# Altium PCB PCB_MEZ.PcbDoc
Units mm, origin at the board's own origin, x right, y up, seen from the top; angles counter-clockwise.
Board outline 65 x 67 mm, 2 copper layers (Top Layer, Bottom Layer); 7 components, 43 nets, 157 pads, 0 vias.
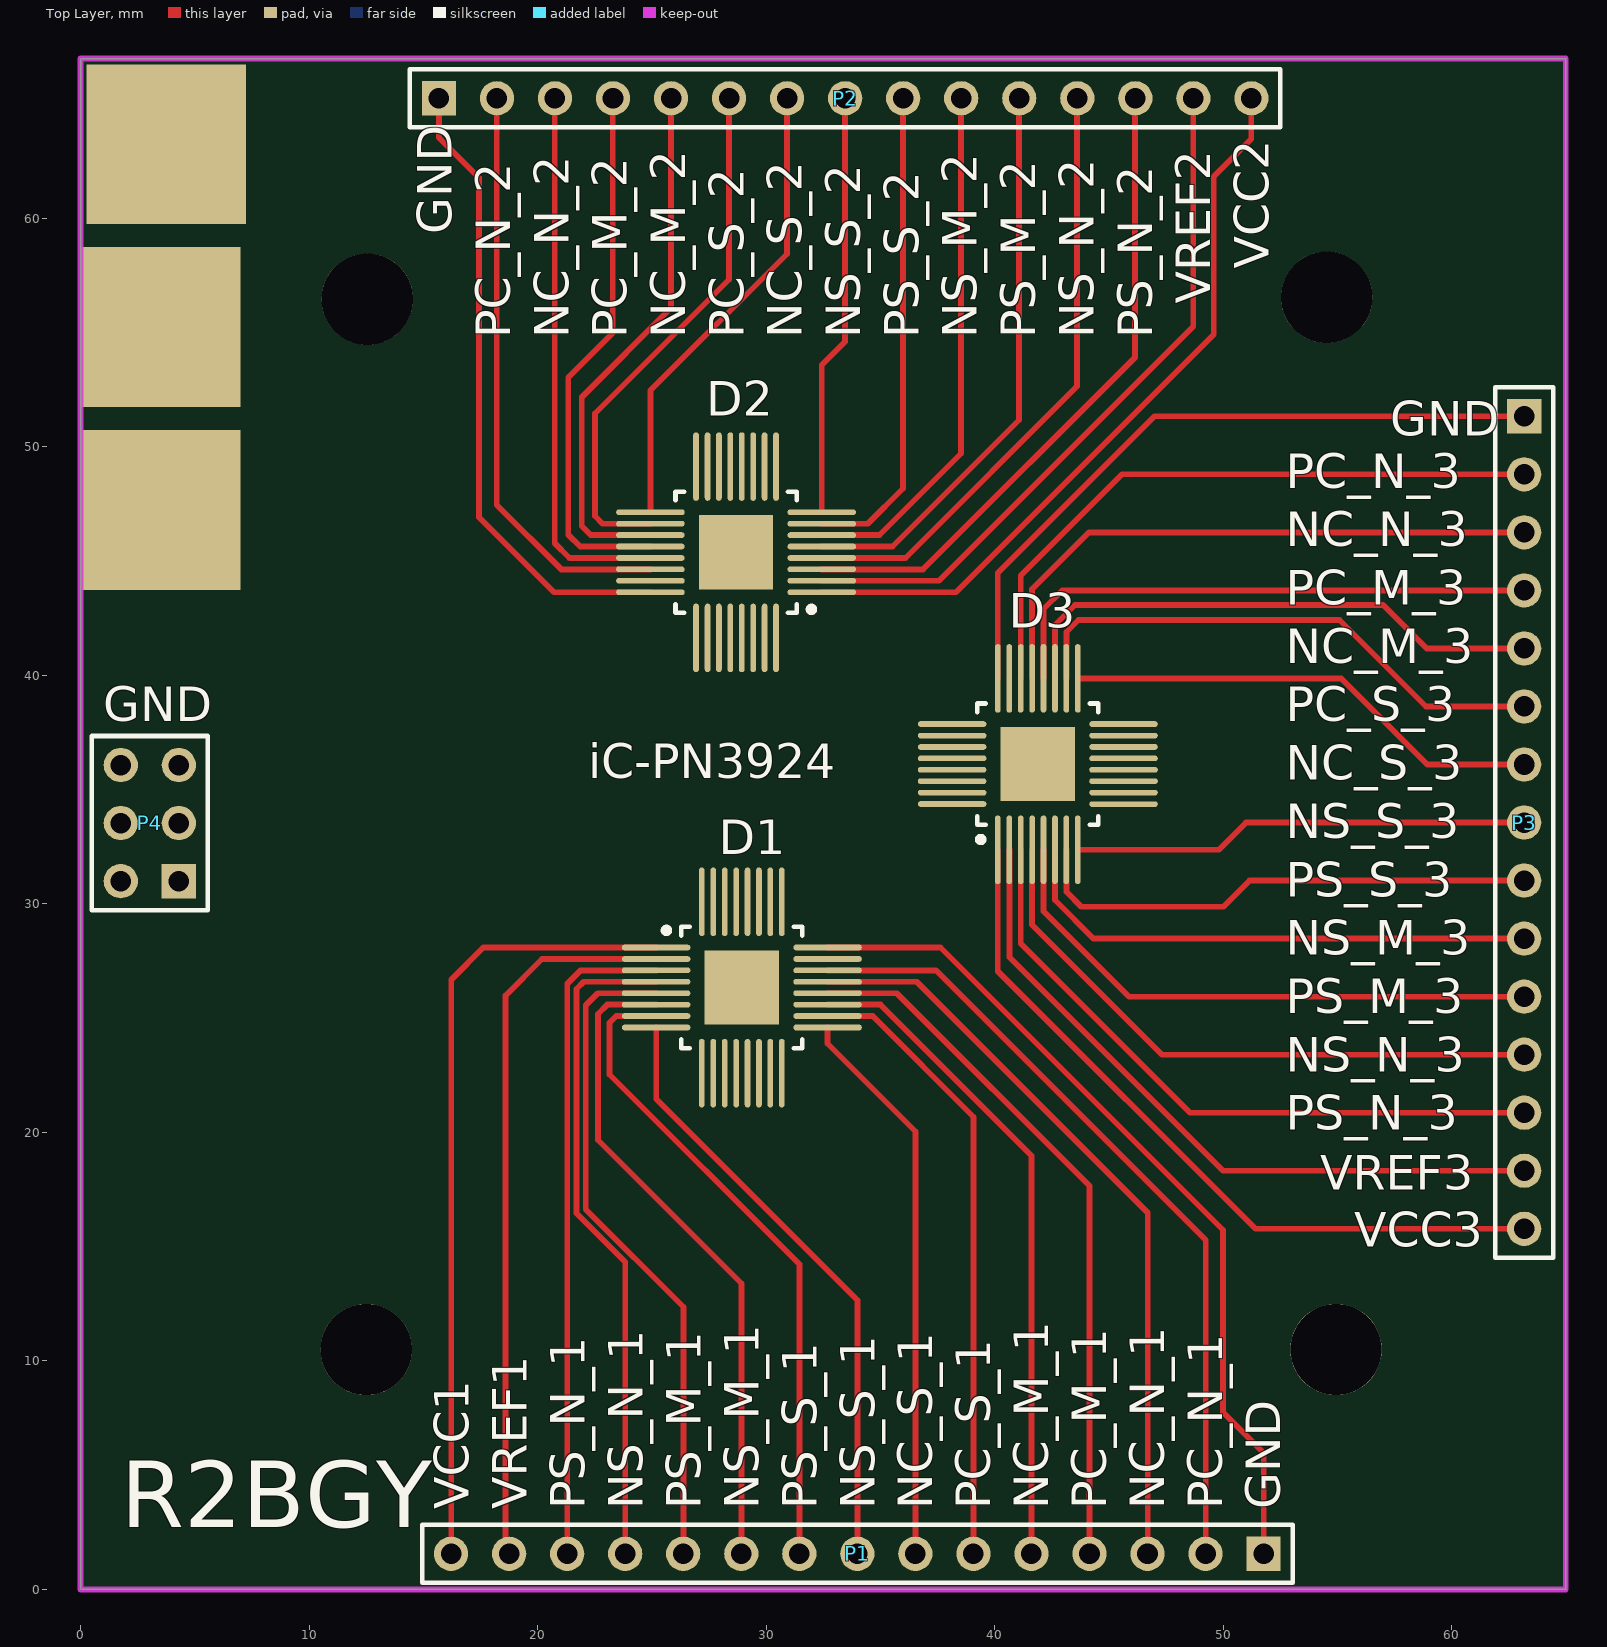
[diagram p0: Top Layer view]
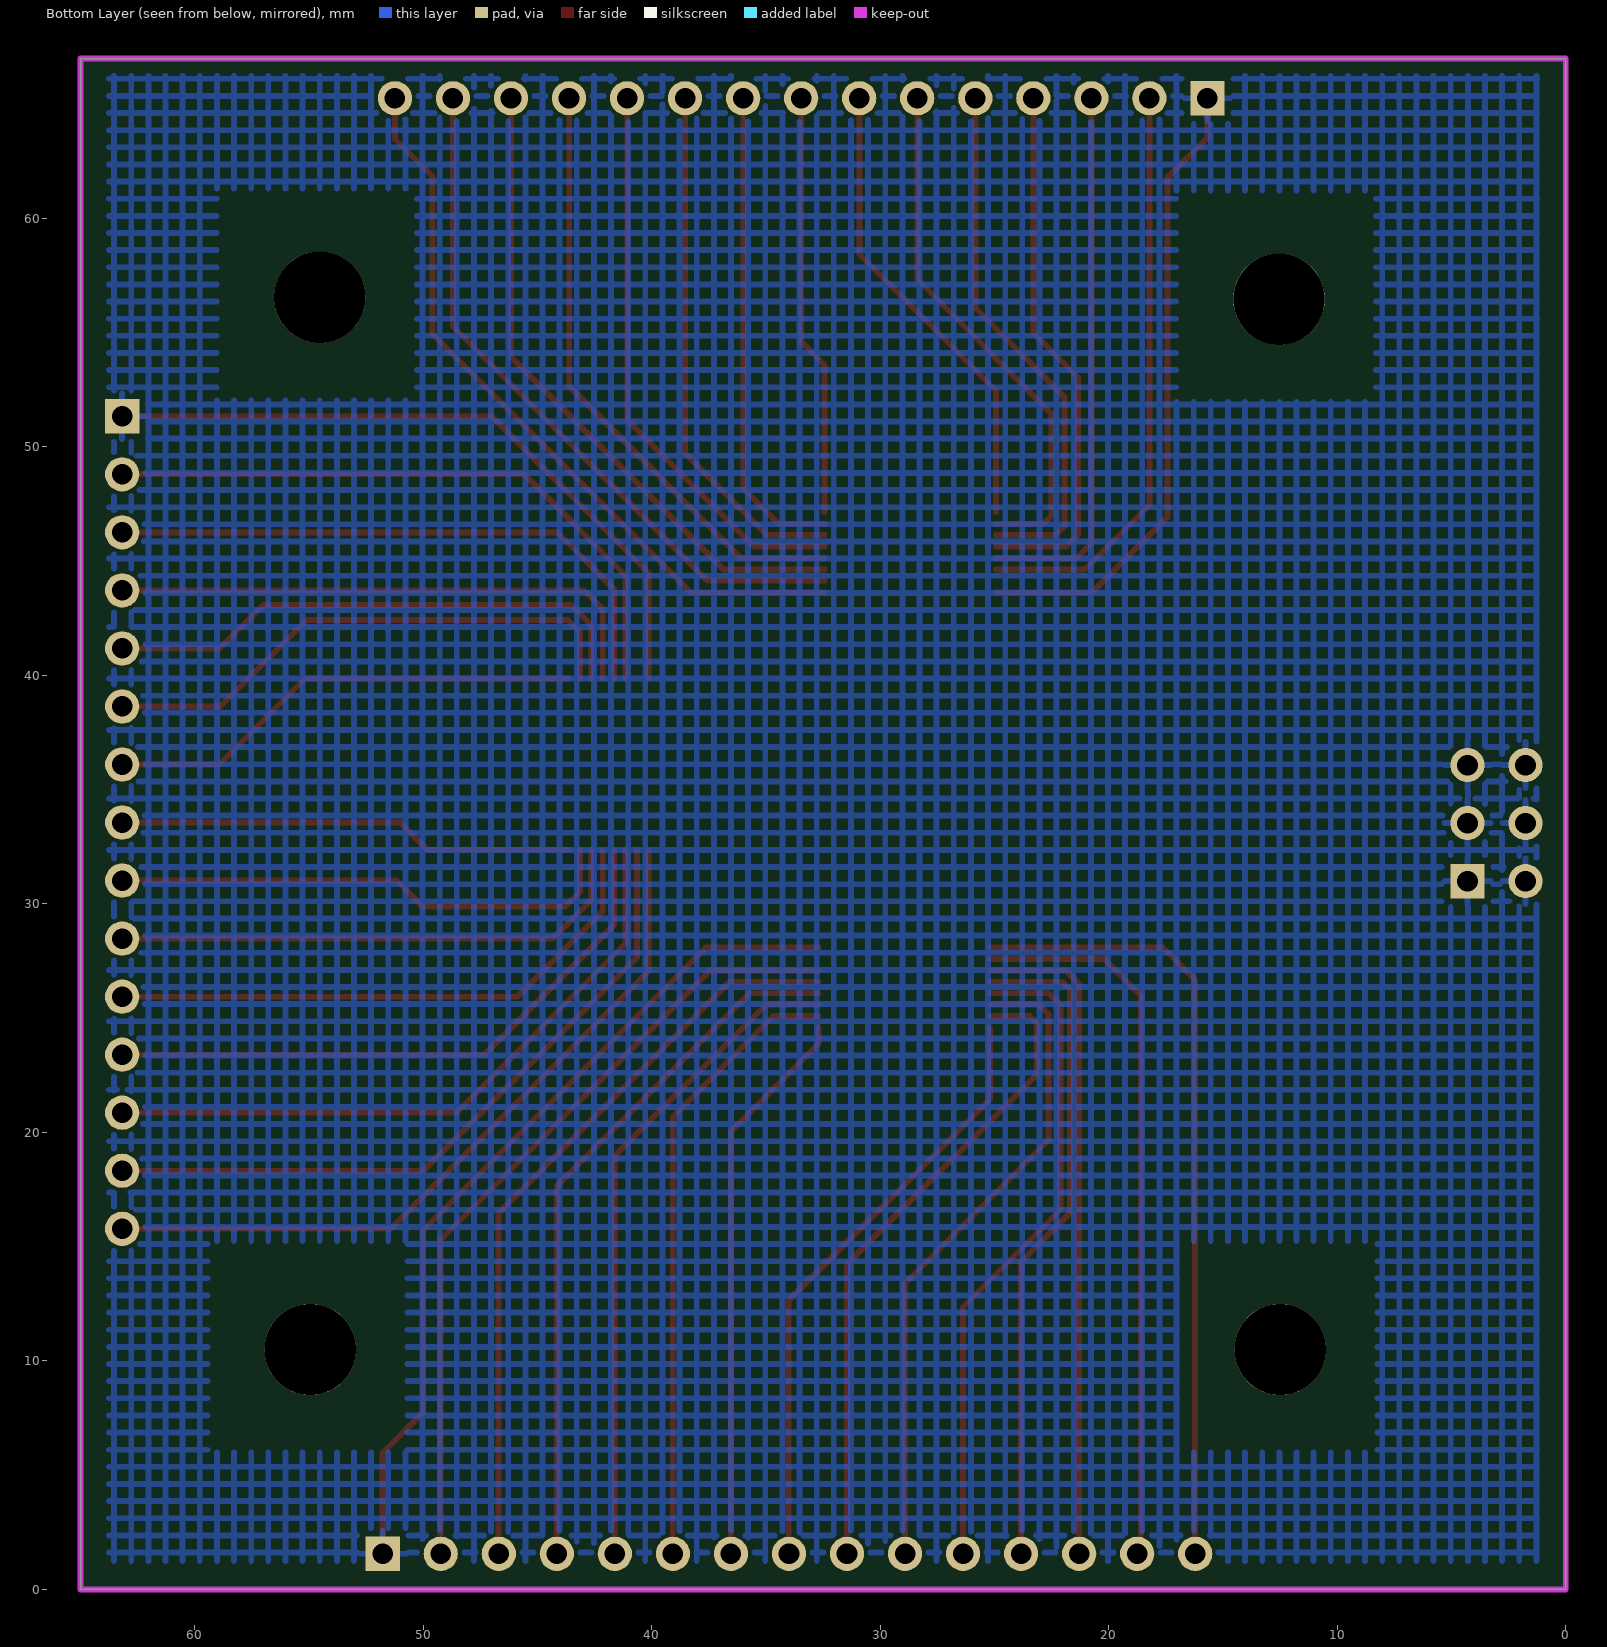
[diagram p1: Bottom Layer view, seen from below]

## Layer stack, top to bottom
Top Solder: solder mask 0.0102, Solder Resist, Dk 3.5
Top Layer: signal copper 0.0356
Dielectric 1: dielectric 0.32, FR-4, Dk 4.8
Bottom Layer: signal copper 0.0356
Bottom Solder: solder mask 0.0102, Solder Resist, Dk 3.5

## Board outline
0,0 65,0 65,67 0,67

## Design rules (kind name [scope] priority, off if disabled: settings)
Clearance [All] p1: gap=0.15
PolygonConnect [All] p1: connectstyle=Relief reliefconductorwidth=0.254 reliefentries=4 polygonreliefangle="90 Angle" airgapwidth=0.254
RoutingVias [All] p1: holewidth=0.711 width=1.27 viastyle="Through Hole" minholewidth=0.711 minwidth=1.27 maxholewidth=0.711 maxwidth=1.27
SolderMaskExpansion [All] p1: expansion=0.102
Width [All] p1: maxlimit=0.254 minlimit=0.254 preferedwidth=0.254
29 further rules are at their usual default settings.

## Components (designator, comment, footprint, x,y, rotation, side; value= is the part's Value field where it differs from the comment)
D1 "iC-PN3924" iC-PN3924 28.941,26.344 r0 top
D2 "iC-PN3924" iC-PN3924 28.687,45.394 r180 top
D3 "iC-PN3924" iC-PN3924 41.895,36.123 r90 top
P1 "Header 15" HDR1X15 51.776,1.56 r180 top
P2 "Header 15" HDR1X15 15.683,65.263 r0 top
P3 "Header 15" HDR1X15 63.181,51.344 r270 top
P4 "GND" HDR2X3 4.3,31 r90 top

## Footprints (in the part's own frame and the unit in brackets; to place one, negate y for a bottom-side part, rotate by r counter-clockwise, add the part's x,y. Pads: shape width x height; smd on the part's side, far side on the other; paste and mask are expansions set on the pad)
HDR1X15 [mm] "Connector; Header; 15 Position"
  rect 1.5x1.5 hole 0.9: 1(0,0)
  round 1.5 hole 0.9: 2(2.54,0) 3(5.08,0) 4(7.62,0) 5(10.16,0) 6(12.7,0) 7(15.24,0) 8(17.78,0) 9(20.32,0) 10(22.86,0) 11(25.4,0) 12(27.94,0) 13(30.48,0) 14(33.02,0) 15(35.56,0)
  silkscreen extent -1.27,-1.27 36.83,1.27
HDR2X3 [mm] "Connector; Header; 3x2 Position"
  rect 1.5x1.5 hole 0.9: 1(0,0)
  round 1.5 hole 0.9: 2(0,2.54) 3(2.54,0) 4(2.54,2.54) 5(5.08,0) 6(5.08,2.54)
  silkscreen extent -1.27,-1.27 6.35,3.81
iC-PN3924 [mm] "QFN, 32-Leads, Body 5,00x5,00mm, Pitch 0,50mm, Thermal Pad 3,25x3,25mm, IPC Medium Density"
  rect 3.25x3.25 smd: 0(0,0)
  oval 3x0.25 smd: 1(-3.75,1.75) 2(-3.75,1.245) 3(-3.75,0.75) 4(-3.75,0.25) 5(-3.75,-0.25) 6(-3.75,-0.75) 7(-3.75,-1.25) 8(-3.75,-1.75) 17(3.75,-1.75) 18(3.75,-1.25) 19(3.75,-0.75) 20(3.75,-0.25) 21(3.75,0.25) 22(3.75,0.75) 23(3.75,1.25) 24(3.75,1.753)
  oval 0.25x3 smd: 9(-1.753,-3.75) 10(-1.25,-3.75) 11(-0.75,-3.75) 12(-0.25,-3.75) 13(0.25,-3.75) 14(0.75,-3.75) 15(1.245,-3.75) 16(1.75,-3.75) 25(1.75,3.75) 26(1.245,3.75) 27(0.75,3.75) 28(0.25,3.75) 29(-0.25,3.75) 30(-0.75,3.75) 31(-1.25,3.75) 32(-1.75,3.75)
  silkscreen extent -3.42,-2.65 2.65,2.65, body extent -2.5,-2.5 2.5,2.5, height 0.9

## Part data
P1 P2 P3: "Header, 15-Pin"
P4: library part "Header 3X2", "Header, 3-Pin, Dual row"

## Free pads (board coordinates)
  rect 7x7 smd: 0(3.5,47.25) 0(3.5,55.25) 0(3.75,63.25)
  round 4 hole 4: 0(12.5,10.5) 0(12.551,56.474) 0(54.537,56.55) 0(54.943,10.5)

## Nets (pads, with @x,y where several pads share a name; then routed paths per layer and width w, separated by ;. In a path a pad name is that pad's centre, name@x,y a point inside that pad or via, vN(x,y) a via of type N, cw(c..) or ccw(c..) an arc to the next point about the centre after c; other vN are vias at no path point)
GND: D1.24 D2.24 D3.24 P1.1 P2.1 P3.1 P4.1 P4.2 P4.3 P4.4 P4.5 P4.6 | length 95.8
  Top Layer w0.254: P2.1 15.683,63.54 17.435,61.787 17.435,46.925 20.718,43.641 D2.24 ; D1.24 37.635,28.097 50,15.731 50,7.756 51.783,5.973 51.783,1.567 P1.1 ; D3.24 40.143,44.486 47,51.343 P3.1 P3.1
NC_M_1: D1.19 P1.5 | length 29.1
  Top Layer w0.254: D1.19 35.007,25.594 41.623,18.978 41.623,1.567 P1.5
NC_M_2: D2.19 P2.5 | length 23.5
  Top Layer w0.254: D2.19 22.331,46.144 21.931,46.544 21.931,52.182 25.835,56.086 25.835,65.256 P2.5
NC_M_3: D3.19 P3.5 | length 24
  Top Layer w0.254: D3.19 42.645,42.214 43.521,43.089 57.008,43.089 58.914,41.183 P3.5 P3.5
NC_N_1: D1.21 P1.3 | length 33.1
  Top Layer w0.254: D1.21 36.597,26.594 46.703,16.489 46.703,1.567 P1.3
NC_N_2: D2.21 P2.3 | length 23.9
  Top Layer w0.254: P2.3 20.755,65.256 20.755,45.789 21.4,45.144 D2.21
NC_N_3: D3.21 P3.3 | length 26.5
  Top Layer w0.254: D3.21 41.645,43.779 44.13,46.263 P3.3 P3.3
NC_S_1: D1.17 P1.7 | length 24.6
  Top Layer w0.254: D1.17 32.691,23.896 36.543,20.045 36.543,1.567 P1.7
NC_S_2: D2.17 P2.7 | length 20.6
  Top Layer w0.254: D2.17 24.937,52.471 30.915,58.449 30.915,65.256 P2.7
NC_S_3: D3.17 P3.7 | length 21.1
  Top Layer w0.254: D3.17 55.174,39.873 58.944,36.103 P3.7 P3.7
NS_M_1: D1.6 P1.10 | length 28.9
  Top Layer w0.254: D1.6 23.054,25.594 22.642,25.182 22.642,19.67 28.923,13.39 28.923,1.567 P1.10
NS_M_2: D2.6 P2.10 | length 23.1
  Top Layer w0.254: D2.6 34.968,46.144 38.535,49.711 38.535,65.256 P2.10
NS_M_3: D3.6 P3.10 | length 23.4
  Top Layer w0.254: D3.6 42.645,30.173 44.335,28.483 P3.10 P3.10
NS_N_1: D1.4 P1.12 | length 29.2
  Top Layer w0.254: P1.12 23.843,1.567 23.843,14.33 21.707,16.466 21.707,26.274 22.026,26.594 D1.4
NS_N_2: D2.4 P2.12 | length 26.9
  Top Layer w0.254: D2.4 36.102,45.144 43.615,52.657 43.615,65.256 P2.12
NS_N_3: D3.4 P3.12 | length 27.2
  Top Layer w0.254: D3.4 41.645,29.09 47.332,23.403 P3.12 P3.12
NS_S_1: D1.8 P1.8 | length 26.7
  Top Layer w0.254: D1.8 25.191,21.465 34.003,12.653 34.003,1.567 P1.8
NS_S_2: D2.8 P2.8 | length 18.5
  Top Layer w0.254: D2.8 32.437,53.585 33.455,54.603 33.455,65.256 P2.8
NS_S_3: D3.8 P3.8 | length 20
  Top Layer w0.254: D3.8 49.823,32.373 51.013,33.563 P3.8 P3.8
PC_M_1: D1.20 P1.4 | length 31.1
  Top Layer w0.254: D1.20 35.726,26.094 44.163,17.657 44.163,1.567 P1.4
PC_M_2: D2.20 P2.4 | length 23.7
  Top Layer w0.254: P2.4 23.295,65.256 23.295,54.994 21.347,53.046 21.347,46.163 21.865,45.644 D2.20
PC_M_3: D3.20 P3.4 | length 24.4
  Top Layer w0.254: D3.20 42.145,42.907 42.961,43.723 P3.4 P3.4
PC_N_1: D1.22 P1.2 | length 35.2
  Top Layer w0.254: D1.22 37.444,27.094 49.243,15.295 49.243,1.567 P1.2
PC_N_2: D2.22 P2.2 | length 25.7
  Top Layer w0.254: P2.2 18.215,65.256 18.215,47.466 21.037,44.644 D2.22
PC_N_3: D3.22 P3.2 | length 28.4
  Top Layer w0.254: D3.22 41.145,44.371 45.577,48.803 P3.2 P3.2
PC_S_1: D1.18 P1.6 | length 27.3
  Top Layer w0.254: D1.18 34.668,25.094 39.083,20.68 39.083,1.567 P1.6
PC_S_2: D2.18 P2.6 | length 23.3
  Top Layer w0.254: D2.18 22.847,46.644 22.515,46.975 22.515,51.471 28.375,57.331 28.375,65.256 P2.6
PC_S_3: D3.18 P3.6 | length 23.9
  Top Layer w0.254: D3.18 43.145,41.901 43.673,42.429 55.103,42.429 58.889,38.643 P3.6 P3.6
PS_M_1: D1.5 P1.11 | length 29.1
  Top Layer w0.254: D1.5 22.64,26.094 22.111,25.565 22.111,16.633 26.383,12.361 26.383,1.567 P1.11
PS_M_2: D2.5 P2.11 | length 25
  Top Layer w0.254: D2.5 35.535,45.644 41.075,51.184 41.075,65.256 P2.11
PS_M_3: D3.5 P3.11 | length 25.3
  Top Layer w0.254: D3.5 42.145,29.682 45.884,25.943 P3.11 P3.11
PS_N_1: D1.3 P1.13 | length 29.1
  Top Layer w0.254: P1.13 21.303,1.567 21.303,26.51 21.887,27.094 D1.3
PS_N_2: D2.3 P2.13 | length 28.9
  Top Layer w0.254: D2.3 36.872,44.644 46.155,53.927 46.155,65.256 P2.13
PS_N_3: D3.3 P3.13 | length 29.2
  Top Layer w0.254: D3.3 41.145,28.269 48.551,20.863 P3.13 P3.13
PS_S_1: D1.7 P1.9 | length 28.8
  Top Layer w0.254: D1.7 23.443,25.094 23.15,24.801 23.15,22.541 31.463,14.228 31.463,1.567 P1.9
PS_S_2: D2.7 P2.9 | length 21.3
  Top Layer w0.254: D2.7 34.452,46.644 35.995,48.187 35.995,65.256 P2.9
PS_S_3: D3.7 P3.9 | length 22.6
  Top Layer w0.254: D3.7 43.145,30.536 43.8,29.881 50.023,29.881 51.165,31.023 P3.9 P3.9
VCC1: D1.1 P1.15 | length 34.7
  Top Layer w0.254: P1.15 16.223,1.567 16.223,26.688 17.629,28.094 D1.1
VCC2: D2.1 P2.15 | length 32.8
  Top Layer w0.254: D2.1 38.31,43.644 49.592,54.926 49.592,61.834 51.235,63.478 51.235,65.256 P2.15
VCC3: D3.1 P3.15 | length 33
  Top Layer w0.254: D3.1 40.145,27.059 51.421,15.783 P3.15 P3.15
VREF1: D1.2 P1.14 | length 31.7
  Top Layer w0.254: P1.14 18.604,1.713 18.604,25.995 20.197,27.589 D1.2
VREF2: D2.2 P2.14 | length 30.9
  Top Layer w0.254: D2.2 37.571,44.149 48.695,55.274 48.695,65.256 P2.14
VREF3: D3.2 P3.14 | length 31.1
  Top Layer w0.254: D3.2 40.651,27.671 49.999,18.323 P3.14 P3.14
pads on no net: D1.0 D1.9 D1.10 D1.11 D1.12 D1.13 D1.14 D1.15 D1.16 D1.23 D1.25 D1.26 D1.27 D1.28 D1.29 D1.30 D1.31 D1.32 D2.0 D2.9 D2.10 D2.11 D2.12 D2.13 D2.14 D2.15 D2.16 D2.23 D2.25 D2.26 D2.27 D2.28 D2.29 D2.30 D2.31 D2.32 D3.0 D3.9 D3.10 D3.11 D3.12 D3.13 D3.14 D3.15 D3.16 D3.23 D3.25 D3.26 D3.27 D3.28 D3.29 D3.30 D3.31 D3.32

## Polygon pours and split planes (outlines as drawn)
GND on Bottom Layer "Top Layer-No Net" (hatched 90Degree grid 0.75 track 0.254, remove dead copper, pour order 4): 1.25,66.25 1.25,1.25 63.75,1.25 63.75,66.25

## Keep-outs
Keep-Out Layer:
  the board outline again, w0.254

## Other copper
Bottom Layer:
  pour cut-out: 8.301,61.224 17.051,61.224 17.051,51.974 8.301,51.974
  pour cut-out: 50.287,61.3 59.037,61.3 59.037,52.05 50.287,52.05
  pour cut-out: 50.693,15.25 59.443,15.25 59.443,6 50.693,6
  pour cut-out: 8.25,15.25 17,15.25 17,6 8.25,6

## Silkscreen, mask and mechanical layers (free items; w line width, h text height)
Top Overlay:
  text "GND" at 16.25,59.321 h1.52 r90
  text "VCC2" at 52,57.797 h1.52 r90
  text "VREF2" at 49.446,56.274 h1.52 r90
  text "PC_N_2" at 18.804,54.75 h1.52 r90
  text "NC_N_2" at 21.357,54.75 h1.52 r90
  text "PC_M_2" at 23.911,54.75 h1.52 r90
  text "NC_M_2" at 26.464,54.75 h1.52 r90
  text "PC_S_2" at 29.018,54.75 h1.52 r90
  text "NC_S_2" at 31.571,54.75 h1.52 r90
  text "NS_S_2" at 34.125,54.75 h1.52 r90
  text "PS_S_2" at 36.679,54.75 h1.52 r90
  text "NS_M_2" at 39.232,54.75 h1.52 r90
  text "PS_M_2" at 41.786,54.75 h1.52 r90
  text "NS_N_2" at 44.339,54.75 h1.52 r90
  text "PS_N_2" at 46.893,54.75 h1.52 r90
  text "GND" at 57.321,50.5 h1.52
  text "PC_N_3" at 52.75,48.2 h1.52
  text "NC_N_3" at 52.75,45.647 h1.52
  text "PC_M_3" at 52.75,43.093 h1.52
  text "NC_M_3" at 52.75,40.54 h1.52
  text "GND" at 1,38 h1.52
  text "PC_S_3" at 52.75,37.986 h1.52
  text "iC-PN3924" at 22.213,35.5 h1.52
  text "NC_S_3" at 52.75,35.432 h1.52
  text "NS_S_3" at 52.75,32.879 h1.52
  text "PS_S_3" at 52.75,30.325 h1.52
  text "NS_M_3" at 52.75,27.772 h1.52
  text "PS_M_3" at 52.75,25.218 h1.52
  text "NS_N_3" at 52.75,22.665 h1.52
  text "PS_N_3" at 52.75,20.111 h1.52
  text "VREF3" at 54.25,17.5 h1.52
  text "VCC3" at 55.75,15 h1.52
  text "VCC1" at 17,3.5 h1.52 r90
  text "VREF1" at 19.536,3.5 h1.52 r90
  text "PS_N_1" at 22.071,3.5 h1.52 r90
  text "NS_N_1" at 24.607,3.5 h1.52 r90
  text "PS_M_1" at 27.143,3.5 h1.52 r90
  text "NS_M_1" at 29.679,3.5 h1.52 r90
  text "PS_S_1" at 32.214,3.5 h1.52 r90
  text "NS_S_1" at 34.75,3.5 h1.52 r90
  text "NC_S_1" at 37.286,3.5 h1.52 r90
  text "PC_S_1" at 39.821,3.5 h1.52 r90
  text "NC_M_1" at 42.357,3.5 h1.52 r90
  text "PC_M_1" at 44.893,3.5 h1.52 r90
  text "NC_N_1" at 47.429,3.5 h1.52 r90
  text "PC_N_1" at 49.964,3.5 h1.52 r90
  text "GND" at 52.5,3.5 h1.52 r90
  text "R2BGY" at 1.75,1.75 h5